# Altium PCB EMG-circuit_v2.PcbDoc
Units mm, origin at the board's own origin, x right, y up, seen from the top; angles counter-clockwise.
Board outline 66.93 x 88.14 mm, 2 copper layers (Top Layer, Bottom Layer); 34 components, 37 nets, 143 pads, 32 vias.
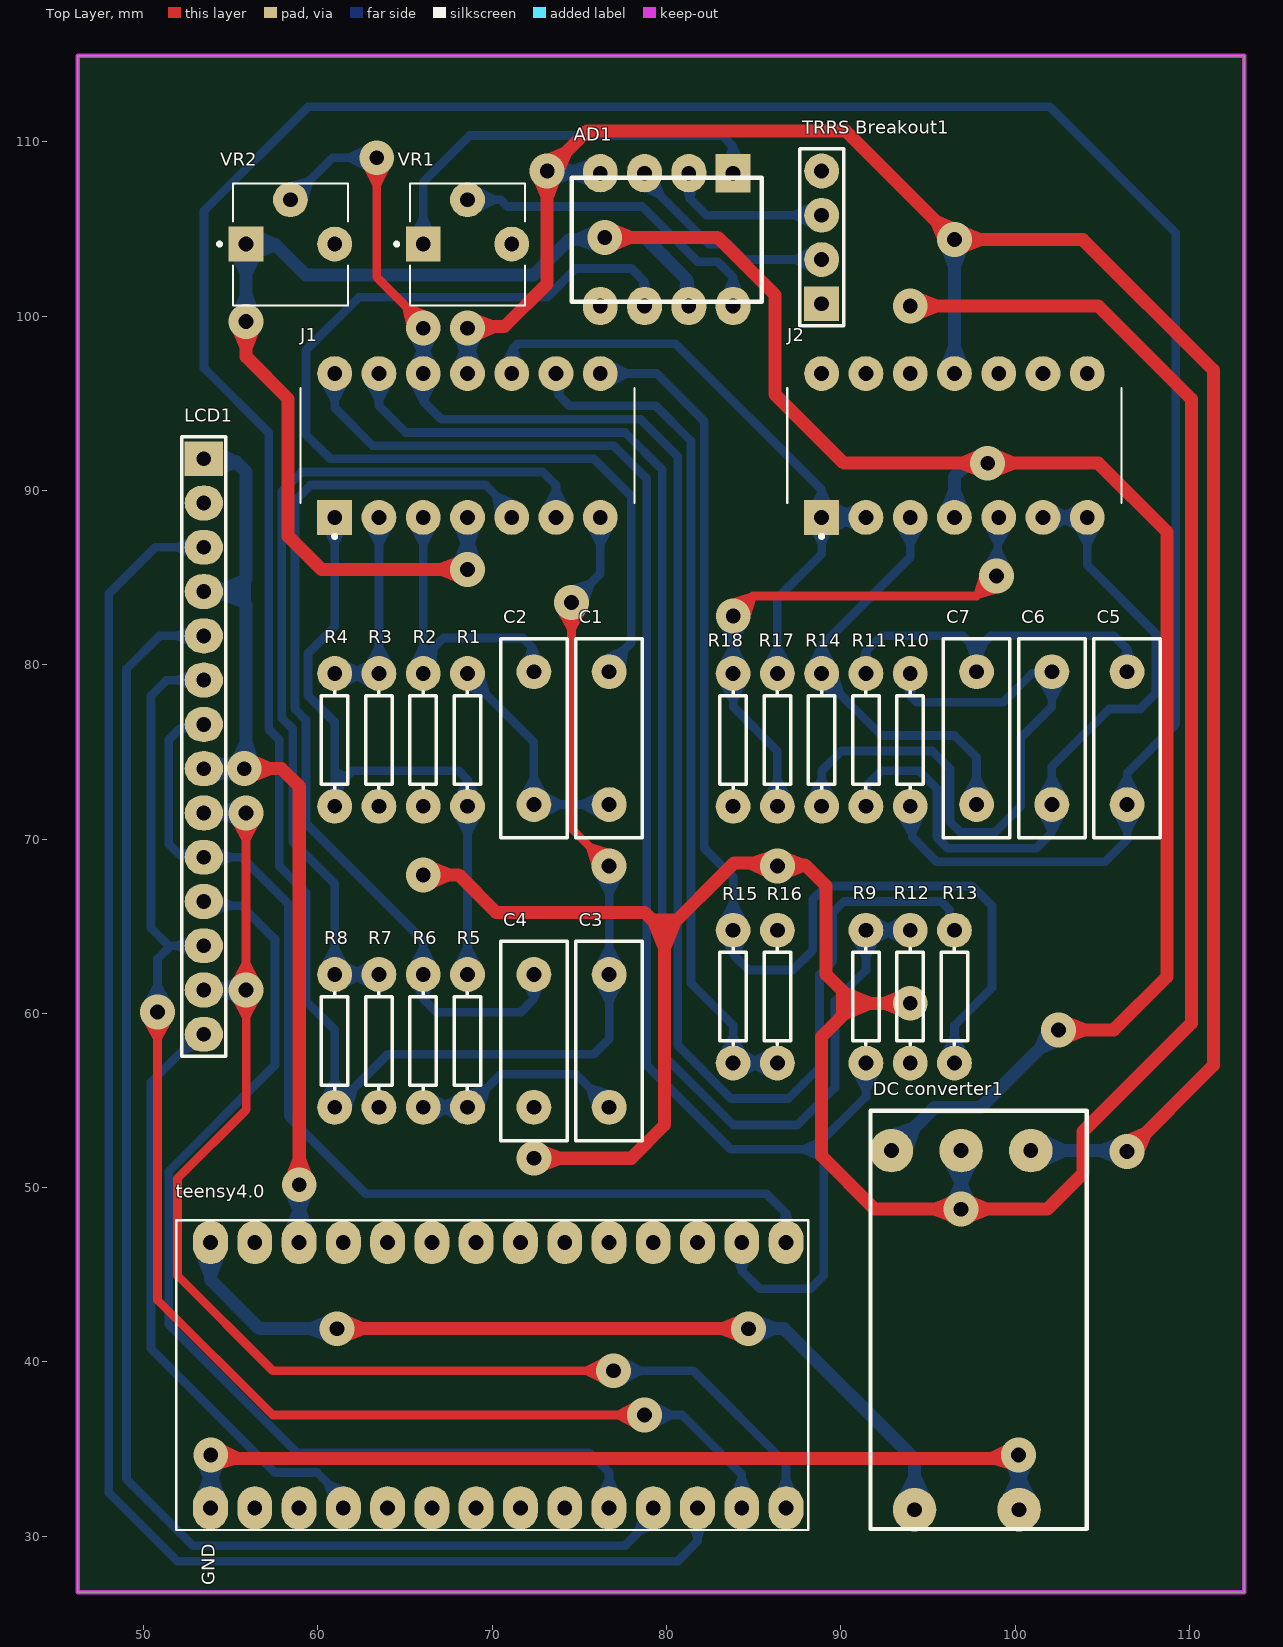
[diagram p0: Top Layer view]
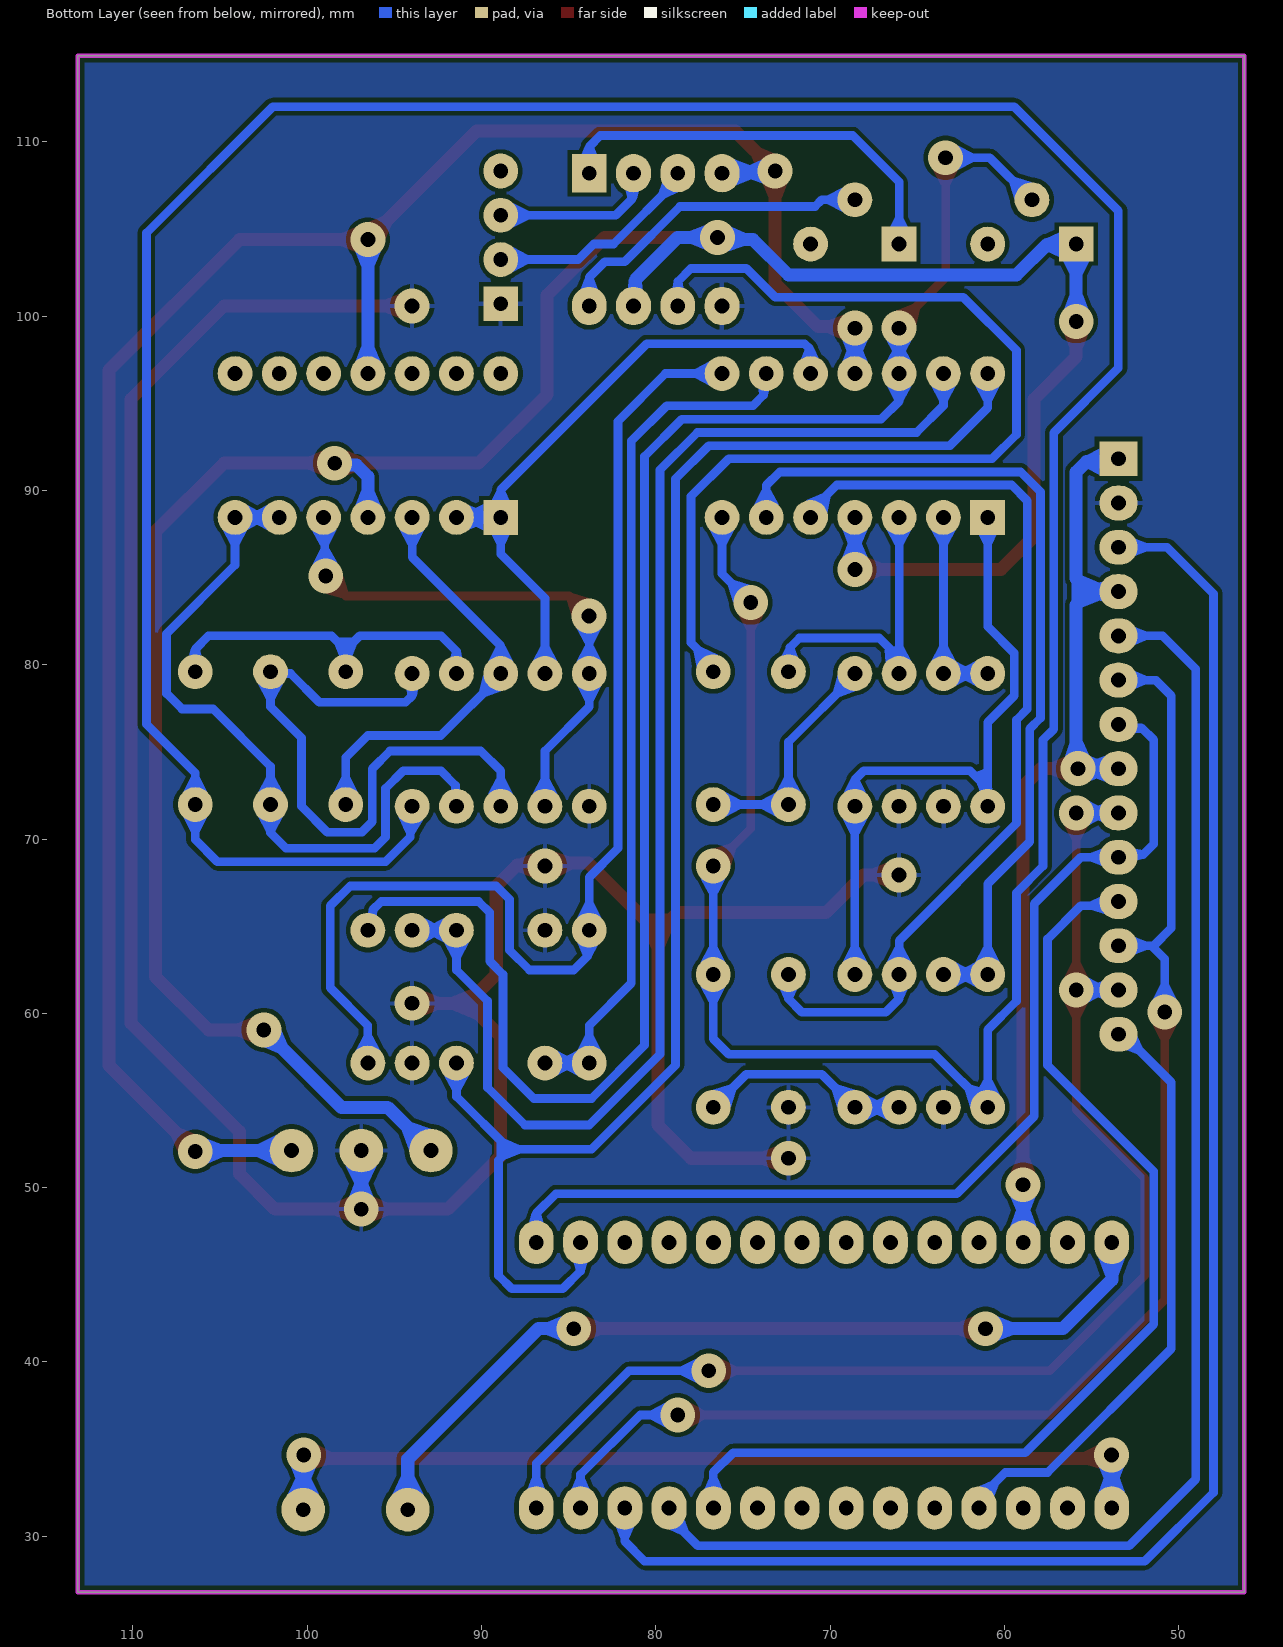
[diagram p1: Bottom Layer view, seen from below]

## Layer stack, top to bottom
Top Solder: solder mask 0.0102, Solder Resist, Dk 3.5
Top Layer: signal copper 0.0356
Dielectric 1: dielectric 0.32, FR-4, Dk 4.8
Bottom Layer: signal copper 0.0356
Bottom Solder: solder mask 0.0102, Solder Resist, Dk 3.5

## Board outline
46.228,26.797 46.228,114.935 113.157,114.935 113.157,26.797

## Design rules (kind name [scope] priority, off if disabled: settings)
Clearance [All] p1: gap=0.254 ignorepadtopadclearanceinfootprint=FALSE except(0: Arc-Hole Track-Hole SMDPad-Hole THPad-Hole Via-Hole Fill-Hole Poly-Hole Region-Hole Text-Hole)
PolygonConnect [All] p1: connectstyle=Relief reliefconductorwidth=0.254 reliefentries=4 polygonreliefangle="90 Angle" airgapwidth=0.254
RoutingVias [All] p1: holewidth=0.711 width=1.27 viastyle="Through Hole" minholewidth=0.711 minwidth=1.27 maxholewidth=0.711 maxwidth=1.27
SolderMaskExpansion [All] p1: expansion=0.102 istentingtop=FALSE
Width [All] p1: maxlimit=0.75 minlimit=0.25 preferedwidth=0.5
30 further rules are at their usual default settings.

## Components (designator, comment, footprint, x,y, rotation, side; value= is the part's Value field where it differs from the comment)
AD1 "[Instrumentation amplifier]8pin-DIP-10.92*7.11" AD620AN-8pin-10.92*7.11 83.82,108.204 r180 top
C1 "Cap" RAD-0.3 76.708,75.792 r270 top value=1uF
C2 "Cap" RAD-0.3 72.39,75.792 r90 top value=1uF
C3 "Cap" RAD-0.3 76.708,58.42 r90 top value=0.01uF
C4 "Cap" RAD-0.3 72.39,58.42 r270 top value=0.01uF
C5 "Cap" RAD-0.3 106.426,75.792 r270 top value=0.1uF
C6 "Cap" RAD-0.3 102.108,75.792 r90 top value=0.2uF
C7 "Cap" RAD-0.3 97.79,75.792 r90 top value=0.1uF
"DC converter1" "5Vto12V_converter_D4B2SM" 5Vto12V_converter-5pin-24*12.4 94.231,31.527 r90 top
J1 "LM324N/NOPB" DIP825W47P254L1917H533Q14 68.58,92.583 r90 top
J2 "LM324N/NOPB" DIP825W47P254L1917H533Q14 96.52,92.583 r90 top
LCD1 "Header 14" HDR1X14 53.452,91.821 r270 top
R1 "Res1" AXIAL-0.3 68.58,75.692 r90 top value=320k
R2 "Res1" AXIAL-0.3 66.04,75.692 r90 top value=320k
R3 "Res1" AXIAL-0.3 63.5,75.692 r270 top value=100k
R4 "Res1" AXIAL-0.3 60.96,75.692 r270 top value=100k
R5 "Res1" AXIAL-0.3 68.58,58.42 r270 top value=16k
R6 "Res1" AXIAL-0.3 66.04,58.42 r90 top value=16k
R7 "Res1" AXIAL-0.3 63.5,58.42 r90 top value=100k
R8 "Res1" AXIAL-0.3 60.96,58.42 r270 top value=100k
R9 "Res1" AXIAL-0.3 91.44,60.96 r270 top value=1.25k
R10 "Res1" AXIAL-0.3 93.98,75.692 r90 top value=26.5k
R11 "Res1" AXIAL-0.3 91.44,75.692 r90 top value=13.3k
R12 "Res1" AXIAL-0.3 93.98,60.96 r90 top value=10k
R13 "Res1" AXIAL-0.3 96.52,60.96 r90 top value=10k
R14 "Res1" AXIAL-0.3 88.9,75.692 r90 top value=26.5k
R15 "Res1" AXIAL-0.3 83.82,60.96 r90 top value=9.1k
R16 "Res1" AXIAL-0.3 86.36,60.96 r270 top value=1k
R17 "Res1" AXIAL-0.3 86.36,75.692 r90 top value=10k
R18 "Res1" AXIAL-0.3 83.82,75.692 r90 top value=1k
teensy4.0 "teensy4.0" teensy4.0 64.937,23.647 r90 top
"TRRS Breakout1" "Header 4" HDR1X4 88.9,100.711 r90 top
VR1 "3362P-1-253LF" TRIM_3362P-1-253LF 68.58,104.14 r0 top
VR2 "3362P-1-253LF" TRIM_3362P-1-253LF 58.42,104.14 r0 top

## Footprints (in the part's own frame and the unit in brackets; to place one, negate y for a bottom-side part, rotate by r counter-clockwise, add the part's x,y. Pads: shape width x height; smd on the part's side, far side on the other; paste and mask are expansions set on the pad)
5Vto12V_converter-5pin-24*12.4 [mm] "5Vto12V_converter-5pin-24*12.4"
  round 2.5 hole 0.85: Gnd1(0,-6) Gnd2(20.6,-2.67) V+(20.6,1.33) V-(20.6,-6.67) Vin(0,0)
  silkscreen extent -1.11,-9.87 22.89,2.53
AD620AN-8pin-10.92*7.11 [mm] "AD620AN-8pin-10.92*7.11"
  rect 2x2.2 hole 0.85: 1(0,0)
  oval 2x2.2 hole 0.85: 2(2.54,0) 3(5.08,0) 4(7.62,0) 5(7.62,7.62) 6(5.08,7.62) 7(2.54,7.62) 8(0,7.62)
  silkscreen extent -1.65,0.26 9.27,7.36
AXIAL-0.3 [mm] "Axial Device, Thru-Hole; 2 Leads; 0.3 in Pin Spacing"
  round 2 hole 0.85: 1(-3.81,0) 2(3.81,0)
  silkscreen extent -2.77,-0.76 2.77,0.76
DIP825W47P254L1917H533Q14 [mm]
  rect 2x2 hole 0.85: 1(-4.128,7.62)
  round 2 hole 0.85: 2(-4.127,5.08) 3(-4.127,2.54) 4(-4.127,0) 5(-4.127,-2.54) 6(-4.127,-5.08) 7(-4.127,-7.62) 8(4.128,-7.62) 9(4.127,-5.08) 10(4.127,-2.54) 11(4.127,0) 12(4.127,2.54) 13(4.127,5.08) 14(4.127,7.62)
  silkscreen extent -5.32,-9.59 3.3,9.59
HDR1X4 [mm] "Connector; Header; 4 Position"
  rect 2x2 hole 0.85: 1(0,0)
  round 2 hole 0.85: 2(2.54,0) 3(5.08,0) 4(7.62,0)
  silkscreen extent -1.27,-1.27 8.89,1.27
HDR1X14 [mm] "Connector; Header; 14 Position"
  rect 2x2.2 hole 0.85: 1(0,0)
  oval 2x2.2 hole 0.85: 2(2.54,0) 3(5.08,0) 4(7.62,0) 5(10.16,0) 6(12.7,0) 7(15.24,0) 8(17.78,0) 9(20.32,0) 10(22.86,0) 11(25.4,0) 12(27.94,0) 13(30.48,0) 14(33.02,0)
  silkscreen extent -1.27,-1.27 34.29,1.27
RAD-0.3 [mm] "Radial Cap, Thru-Hole; 2 Leads; 0.3 in Pin Spacing"
  round 2 hole 0.85: 1(-3.81,0) 2(3.81,0)
  silkscreen extent -5.71,-1.91 5.72,1.91
teensy4.0 [mm]
  oval 2.5x2 hole 0.85: 0(7.976,8.56) 1(7.976,6.02) 2(7.976,3.48) 3(7.976,0.94) 3.3V_2(23.216,6.02) 4(7.976,-1.6) 5(7.976,-4.14) 6(7.976,-6.68) 7(7.976,-9.22) 8(7.976,-11.76) 9(7.976,-14.3) 10(7.976,-16.84) 11(7.976,-19.38) 12(7.976,-21.92) 13(23.216,-21.92) 14(23.216,-19.38) 15(23.216,-16.84) 16(23.216,-14.3) 17(23.216,-11.76) 18(23.216,-9.22) 19(23.216,-6.68) 20(23.216,-4.14) 21(23.216,-1.6) 22(23.216,0.94) 23(23.216,3.48) G1(7.976,11.1) G3(23.216,8.56) VIN(23.216,11.1)
  silkscreen extent 6.71,-23.19 24.49,13.07
TRIM_3362P-1-253LF [mm]
  rect 2x2 hole 0.85: 1(-2.54,0)
  round 2 hole 0.85: 2(0,2.54) 3(2.54,0)
  silkscreen extent -4.16,-3.53 3.3,3.47, body extent -1.55,-0.8 1.55,0.8, height 0.65

## Part data
AD1: library part OP
C1 C2 C3 C4 C5 C6 C7: "Capacitor", LatestRevisionDate=17-Jul-2002, LatestRevisionNote="Re-released for DXP Platform.", PackageDescription="Radial Cap, Thru-Hole; 2 Leads; 0.3 in Pin Spacing", PackageReference=RAD-0.3, Published=8-Jun-2000, Publisher="Altium Limited"
"DC converter1": "5V to +-12V DC converter"
J1 J2: Package=None, Availability=Unavailable, MP=LM324N/NOPB, Price=None
LCD1: "Header, 14-Pin", LatestRevisionDate=17-Jul-2002, LatestRevisionNote="Re-released for DXP Platform.", Publisher="Altium Limited"
R1 R2 R3 R4 R5 R6 R7 R8 R9 R10 R11 R12 R13 R14 R15 R16 R17 R18: "Resistor", LatestRevisionDate=17-Jul-2002, LatestRevisionNote="Re-released for DXP Platform.", PackageDescription="Axial Device, Thru-Hole; 2 Leads; 0.3 in Pin Spacing", PackageReference=AXIAL-0.3, Published=8-Jun-2000, Publisher="Altium Limited"
"TRRS Breakout1": "Header, 4-Pin", LatestRevisionDate=17-Jul-2002, LatestRevisionNote="Re-released for DXP Platform.", Publisher="Altium Limited"
VR1 VR2: "25 kOhms 0.5W, 1/2W PC Pins Through Hole Trimmer Potentiometer Cermet 1 Turn Top Adjustment", Package="3116 Bourns", Availability=Good, Check_prices=https://www.snapeda.com/parts/3362P-1-253LF/Bourns/view-part/493663/?ref=eda, MF=Bourns, MP=3362P-1-253LF, Price=None, Purchase-URL=https://pricing.snapeda.com/search/part/3362P-1-253LF/?ref=eda, SnapEDA_Link=https://www.snapeda.com/parts/3362P-1-253LF/Bourns/view-part/493663/?ref=snap

## Via types
v1: diameter 2, hole 0.85, Top Layer to Bottom Layer, 32 vias

## Nets (pads, with @x,y where several pads share a name; then routed paths per layer and width w, separated by ;. In a path a pad name is that pad's centre, name@x,y a point inside that pad or via, vN(x,y) a via of type N, cw(c..) or ccw(c..) an arc to the next point about the centre after c; other vN are vias at no path point)
3.3V: LCD1.1 LCD1.4 LCD1.8 teensy4.0.3.3V_2 | length 54.2
  Top Layer w0.75: v1(55.77,74.041) 57.912,74.041 58.928,73.025 v1(58.928,50.165)
  Bottom Layer w0.75: LCD1.8 v1(55.77,74.041) 55.88,74.041 55.88,83.439 55.118,84.201 ; LCD1.4 55.118,84.201 ; LCD1.1 53.622,91.651 55.288,91.651 55.88,91.059 55.88,84.963 55.118,84.201 ; teensy4.0.3.3V_2 58.923,46.868 58.923,50.16 v1(58.928,50.165)
+12V: "DC converter1.V+" AD1.7 J1.4 J2.4 VR2.1 | length 153.9
  Top Layer w0.75: v1(55.88,99.695) 55.88,97.663 58.293,95.25 58.293,87.376 60.198,85.471 v1(68.58,85.471) ; v1(76.454,104.521) 82.931,104.521 86.233,101.219 86.233,95.504 90.17,91.567 v1(98.425,91.567) 104.775,91.567 108.712,87.63 108.712,62.103 105.664,59.055 v1(102.489,59.055)
  Bottom Layer w0.75: v1(55.88,99.695) VR2.1 55.915,104.105 57.566,104.105 59.309,102.362 72.39,102.362 74.429,104.401 76.334,104.401 v1(76.454,104.521) 78.74,104.521 81.176,102.085 81.176,100.688 AD1.7 ; v1(68.58,85.471) J1.4 ; 92.901,52.126 95.385,54.61 98.044,54.61 v1(102.489,59.055) ; J2.4 96.52,90.805 97.172,91.457 98.315,91.457 v1(98.425,91.567)
-12V: "DC converter1.V-" AD1.4 J1.11 J2.11 | length 122.8
  Top Layer w0.75: v1(68.58,99.314) 68.673,99.407 70.705,99.407 73.152,101.854 v1(73.152,108.331) 75.438,110.617 90.297,110.617 v1(96.52,104.394) 103.886,104.394 111.379,96.901 111.379,57.023 v1(106.426,52.07)
  Bottom Layer w0.75: J1.11 v1(68.58,99.314) ; v1(73.152,108.331) 73.215,108.267 76.136,108.267 AD1.4 ; J2.11 v1(96.52,104.394) ; 100.901,52.126 106.37,52.126 v1(106.426,52.07)
CS: LCD1.3 teensy4.0.10 | length 95.9
  Bottom Layer w0.5: LCD1.3 50.673,86.741 48.006,84.074 48.006,32.512 51.943,28.575 80.645,28.575 81.777,29.707 teensy4.0.10
D/C: LCD1.5 teensy4.0.9 | length 84.7
  Bottom Layer w0.5: LCD1.5 50.927,81.661 49.022,79.756 49.022,33.274 52.832,29.464 77.597,29.464 79.237,31.104 teensy4.0.9
g: "DC converter1.Gnd1" teensy4.0.G1 | length 52.7
  Top Layer w0.75: v1(53.848,34.671) 54.044,34.475 100.007,34.475 v1(100.203,34.671)
  Bottom Layer w0.75: teensy4.0.G1 53.843,31.628 53.843,34.666 v1(53.848,34.671) ; v1(100.203,34.671) 100.217,34.657 100.217,31.54 100.231,31.526
gnd: "DC converter1.Gnd2" "TRRS Breakout1.1" AD1.5 C4.2 LCD1.2 R2.1 R3.2 R7.1 R12.1 R16.1 R18.1 | length 152
  Top Layer w0.75: v1(66.04,67.945) 68.072,67.945 70.231,65.786 78.74,65.786 79.883,64.643 ; v1(72.39,51.689) 77.978,51.689 79.883,53.594 79.883,64.643 ; v1(93.98,60.579) 90.805,60.579 ; v1(93.98,100.584) 104.775,100.584 110.109,95.25 110.109,59.436 103.886,53.213 103.886,50.8 101.854,48.768 v1(96.901,48.768) 91.948,48.768 88.9,51.816 88.9,58.674 90.805,60.579 ; 79.883,64.643 83.86,68.62 86.193,68.62 v1(86.36,68.453) 86.418,68.511 87.953,68.511 89.154,67.31 89.154,62.23 90.805,60.579
  Bottom Layer w0.75: v1(96.901,48.768) 96.901,52.126
NetAD1_1: AD1.1 VR1.1 | length 24.2
  Bottom Layer w0.5: VR1.1 66.04,107.696 68.707,110.363 83.185,110.363 83.82,109.728 AD1.1
NetAD1_2: "TRRS Breakout1.3" AD1.2 | length 9.4
  Bottom Layer w0.5: AD1.2 81.348,108.136 81.348,106.739 82.296,105.791 88.9,105.791
NetAD1_3: "TRRS Breakout1.2" AD1.3 | length 12.4
  Bottom Layer w0.5: AD1.3 78.74,107.823 82.423,104.14 83.566,104.14 84.455,103.251 88.9,103.251
NetAD1_6: AD1.6 C1.1 | length 58.6
  Bottom Layer w0.5: C1.1 76.708,79.998 77.978,81.268 77.978,89.662 75.819,91.821 60.706,91.821 59.309,93.218 59.309,98.044 62.357,101.092 73.152,101.092 74.803,102.743 77.978,102.743 78.727,101.994 78.727,100.597 AD1.6
NetAD1_8: AD1.8 VR1.2 | length 18.7
  Bottom Layer w0.5: VR1.2 70.485,106.68 70.866,106.299 78.613,106.299 81.788,103.124 82.931,103.124 83.82,102.235 AD1.8
NetC1_2: C1.2 C2.1 R1.2 | length 13.4
  Bottom Layer w0.5: R1.2 68.58,79.377 72.39,75.567 C2.1 C1.2
NetC2_2: C2.2 J1.3 R2.2 | length 17.3
  Bottom Layer w0.5: R2.2 R2.2@66.04,80.391 ; J1.3 R2.2@66.04,80.391 ; C2.2 72.301,79.691 72.301,80.988 71.755,81.534 67.183,81.534 R2.2@66.04,80.391
NetC3_1: C3.1 R5.2 R6.1 | length 12.2
  Bottom Layer w0.5: R6.1 R5.2 70.485,56.515 74.803,56.515 C3.1
NetC3_2: C3.2 C5.2 J1.7 R8.2 R10.1 | length 215.8
  Top Layer w0.5: v1(74.549,83.566) 74.549,70.612 v1(76.708,68.453)
  Bottom Layer w0.5: v1(74.549,83.566) 76.2,85.217 J1.7 ; v1(76.708,68.453) 76.708,58.547 75.819,57.658 64.008,57.658 R8.2 60.96,59.055 59.309,60.706 59.309,66.929 57.785,68.453 57.785,75.692 57.174,76.303 57.174,93.321 53.467,97.028 53.467,106.045 59.436,112.014 101.981,112.014 109.22,104.775 109.22,76.581 106.426,73.787 C5.2 106.426,69.977 105.156,68.707 95.504,68.707 94.095,70.116 94.095,71.767 R10.1
NetC4_1: C4.1 J1.5 R6.2 | length 53.9
  Bottom Layer w0.5: J1.5 71.12,88.805 69.612,90.313 59.579,90.313 58.682,89.416 58.682,77.462 59.309,76.835 59.309,70.906 66.04,64.175 R6.2 66.04,60.833 66.802,60.071 71.628,60.071 72.39,60.833 C4.1@72.39,62.355
NetC5_1: C5.1 C7.2 R11.2 | length 20.2
  Bottom Layer w0.5: R11.2 91.44,80.772 92.329,81.661 96.977,81.661 97.79,80.848 ; C7.2 97.79,80.848 ; C5.1 106.426,80.899 105.664,81.661 98.603,81.661 97.79,80.848
NetC6_1: C6.1 J2.6 J2.7 R11.1 | length 41.8
  Bottom Layer w0.5: R11.1 91.492,71.934 91.492,73.077 92.329,73.914 94.488,73.914 95.504,72.898 95.504,70.104 96.139,69.469 101.219,69.469 102.108,70.358 102.108,74.168 105.41,77.47 107.188,77.47 108.077,78.359 108.077,81.788 104.14,85.725 J2.7 J2.6
NetC6_2: C6.2 R10.2 R14.1 | length 37
  Bottom Layer w0.5: R14.1 88.9,73.914 90.043,75.057 95.25,75.057 96.266,74.041 96.266,70.993 96.862,70.397 98.845,70.397 100.33,71.882 100.33,75.819 102.108,77.597 C6.2 102.006,79.5 100.963,79.5 99.314,77.851 94.361,77.851 93.98,78.232 R10.2
NetC7_1: C7.1 J2.3 R14.2 | length 24.7
  Bottom Layer w0.5: J2.3 93.98,86.169 88.9,81.089 88.9,79.377 92.331,75.946 96.52,75.946 97.79,74.676 C7.1
NetJ1_1: J1.1 R1.1 R4.2 R5.1 | length 37.3
  Bottom Layer w0.5: R4.2 60.96,72.898 ; J1.1 60.96,82.195 59.436,80.671 59.436,78.232 60.96,76.708 60.96,72.898 ; R5.1 68.58,73.406 68.072,73.914 61.976,73.914 60.96,72.898
NetJ1_2: J1.2 R3.1 R4.1 | length 11.5
  Bottom Layer w0.5: R4.1 R3.1 J1.2
NetJ1_6: J1.6 R7.2 R8.1 | length 49.9
  Bottom Layer w0.5: R7.2 R8.1 60.96,67.437 58.547,69.85 58.547,76.327 57.928,76.946 57.928,89.932 59.063,91.067 72.89,91.067 73.66,90.297 J1.6
NetJ1_8: J1.8 R13.1 R15.2 | length 67.7
  Bottom Layer w0.5: J1.8 79.438,96.71 82.169,93.98 82.169,69.469 83.82,67.818 83.82,64.895 R15.2 83.92,64.67 83.92,63.273 84.709,62.484 87.249,62.484 88.392,63.627 88.392,66.548 89.154,67.31 97.536,67.31 98.679,66.167 98.679,61.468 96.52,59.309 R13.1
NetJ1_9: J1.9 R15.1 R16.2 | length 49.2
  Bottom Layer w0.5: J1.9 73.816,96.554 73.816,95.475 74.422,94.869 79.375,94.869 81.407,92.837 81.407,61.722 83.82,59.309 R15.1 R16.2
NetJ1_10: J1.10 J2.1 J2.2 R17.2 | length 36.9
  Bottom Layer w0.5: J1.10 71.173,96.764 71.173,98.132 71.466,98.425 80.518,98.425 88.9,90.043 J2.1 88.9,86.36 86.36,83.82 R17.2
  Bottom Layer w0.75: J2.1 J2.2
NetJ1_12: J1.12 R13.2 VR2.2 | length 98.5
  Top Layer w0.5: v1(63.373,109.093) 63.373,102.235 66.04,99.568 v1(66.04,99.314)
  Bottom Layer w0.5: VR2.2 60.833,109.093 v1(63.373,109.093) ; v1(66.04,99.314) 66.04,95.123 67.08,94.083 78.51,94.083 80.645,91.948 80.645,58.166 83.693,55.118 86.995,55.118 88.773,56.896 88.773,62.23 89.535,62.992 89.535,65.786 90.17,66.421 95.758,66.421 96.233,65.946 96.233,65.057 R13.2
NetJ1_13: J1.13 R9.1 R12.2 | length 77.9
  Bottom Layer w0.5: J1.13 63.5,94.869 65.04,93.329 77.613,93.329 79.756,91.186 79.756,57.658 83.82,53.594 87.503,53.594 89.662,55.753 89.662,60.706 91.44,62.484 R9.1 R12.2
NetJ2_5: J2.5 R17.1 R18.2 | length 31.5
  Top Layer w0.5: v1(83.827,82.804) 83.827,82.811 84.963,83.947 97.79,83.947 v1(98.933,85.09)
  Bottom Layer w0.5: v1(83.827,82.804) 83.824,82.8 83.824,79.506 R18.2 83.82,77.597 86.36,75.057 R17.1 ; v1(98.933,85.09) 98.996,85.153 98.996,88.392 J2.5
SCK: LCD1.7 LCD1.10 teensy4.0.13 | length 61.4
  Bottom Layer w0.5: LCD1.7 53.229,76.358 52.101,76.358 51.435,75.692 51.435,69.723 52.038,69.12 53.293,69.12 LCD1.10 55.626,68.961 58.293,66.294 58.293,54.102 62.738,49.657 85.725,49.657 86.857,48.525 teensy4.0.13
SDI(MOSI): LCD1.6 LCD1.12 teensy4.0.11 | length 80.3
  Top Layer w0.5: v1(50.8,60.071) 50.8,43.561 57.404,36.957 v1(78.74,36.957)
  Bottom Layer w0.5: v1(50.8,60.071) 50.8,63.119 51.562,63.881 53.177,63.881 LCD1.12 ; 51.435,63.881 50.419,64.897 50.419,78.232 51.308,79.121 LCD1.6 ; v1(78.74,36.957) 80.899,36.957 84.317,33.539 teensy4.0.11
SDO(MISO): LCD1.9 LCD1.13 teensy4.0.12 | length 75
  Top Layer w0.5: v1(55.873,71.501) 55.876,71.497 55.876,61.345 v1(55.88,61.341) 55.88,54.472 51.943,50.535 51.943,44.958 57.404,39.497 v1(76.962,39.497)
  Bottom Layer w0.5: LCD1.13 v1(55.88,61.341) ; LCD1.9 v1(55.873,71.501) ; v1(76.962,39.497) 81.534,39.497 86.857,34.174 teensy4.0.12
T_CS: LCD1.11 teensy4.0.8 | length 60.4
  Bottom Layer w0.5: LCD1.11 53.691,66.182 55.611,66.182 57.531,64.262 57.531,57.023 51.435,50.927 51.435,42.164 58.801,34.798 75.565,34.798 76.697,33.666 teensy4.0.8
T_IRQ: LCD1.14 teensy4.0.2 | length 34.6
  Bottom Layer w0.5: LCD1.14 53.177,58.801 50.419,56.043 50.419,40.767 57.531,33.655 59.944,33.655 61.457,32.142 teensy4.0.2
VCC: "DC converter1.Vin" teensy4.0.VIN | length 49.7
  Top Layer w0.75: v1(61.087,41.91) v1(84.709,41.91)
  Bottom Layer w0.75: teensy4.0.VIN 53.837,44.715 56.642,41.91 v1(61.087,41.91) ; v1(84.709,41.91) 86.741,41.91 94.231,34.42 94.231,31.526
Vout: J1.14 R9.2 teensy4.0.14 | length 87.5
  Bottom Layer w0.5: J1.14 60.96,94.742 63.127,92.575 76.97,92.575 78.867,90.678 78.867,57.023 83.693,52.197 88.406,52.197 ; teensy4.0.14 84.317,45.223 85.344,44.196 88.265,44.196 89.027,44.958 89.027,51.576 88.406,52.197 ; R9.2 91.44,55.231 88.406,52.197
pads on no net: "TRRS Breakout1.4" J2.8 J2.9 J2.10 J2.12 J2.13 J2.14 teensy4.0.0 teensy4.0.1 teensy4.0.3 teensy4.0.4 teensy4.0.5 teensy4.0.6 teensy4.0.7 teensy4.0.15 teensy4.0.16 teensy4.0.17 teensy4.0.18 teensy4.0.19 teensy4.0.20 teensy4.0.21 teensy4.0.22 teensy4.0.23 teensy4.0.G3 VR1.3 VR2.3

## Polygon pours and split planes (outlines as drawn)
gnd on Bottom Layer "GND_L02_P000" (solid, remove dead copper, pour order 0): 46.228,114.935 113.157,114.935 113.157,26.797 46.228,26.797

## Keep-outs
Keep-Out Layer:
  the board outline again, w0.254

## Text inside footprints (layer, text, board x,y; h text height)
teensy4.0: Top Overlay "GND" at 54.091,27.178 h0.76 r90; Mechanical 13 "GND" at 54.091,27.178 h0.81 r90